# EAGLE board prefinish2 (EAGLE 4.16), part 1 of 2
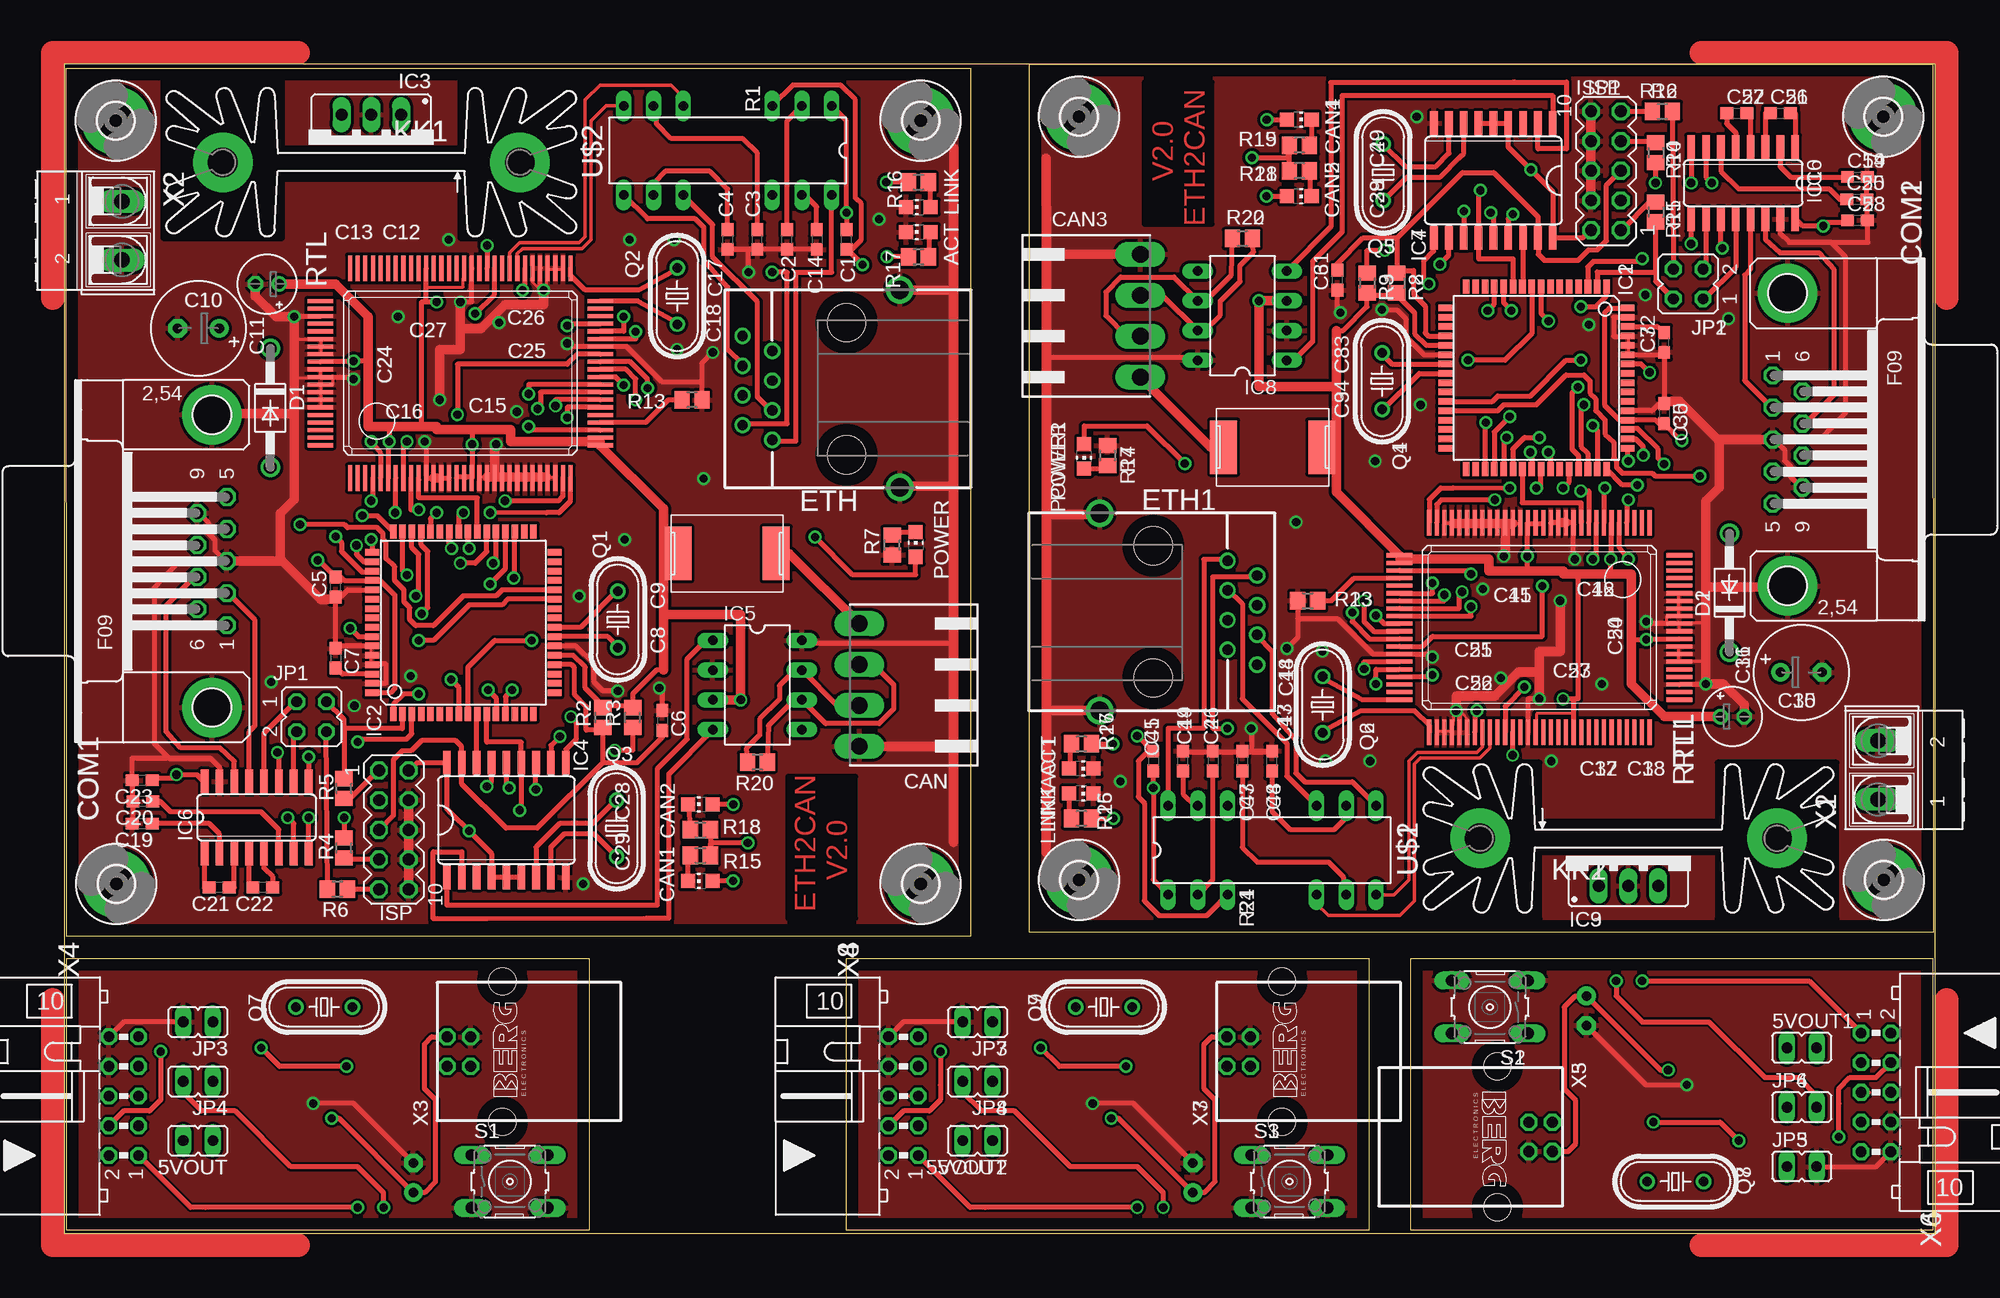
[diagram p0: board, top side]
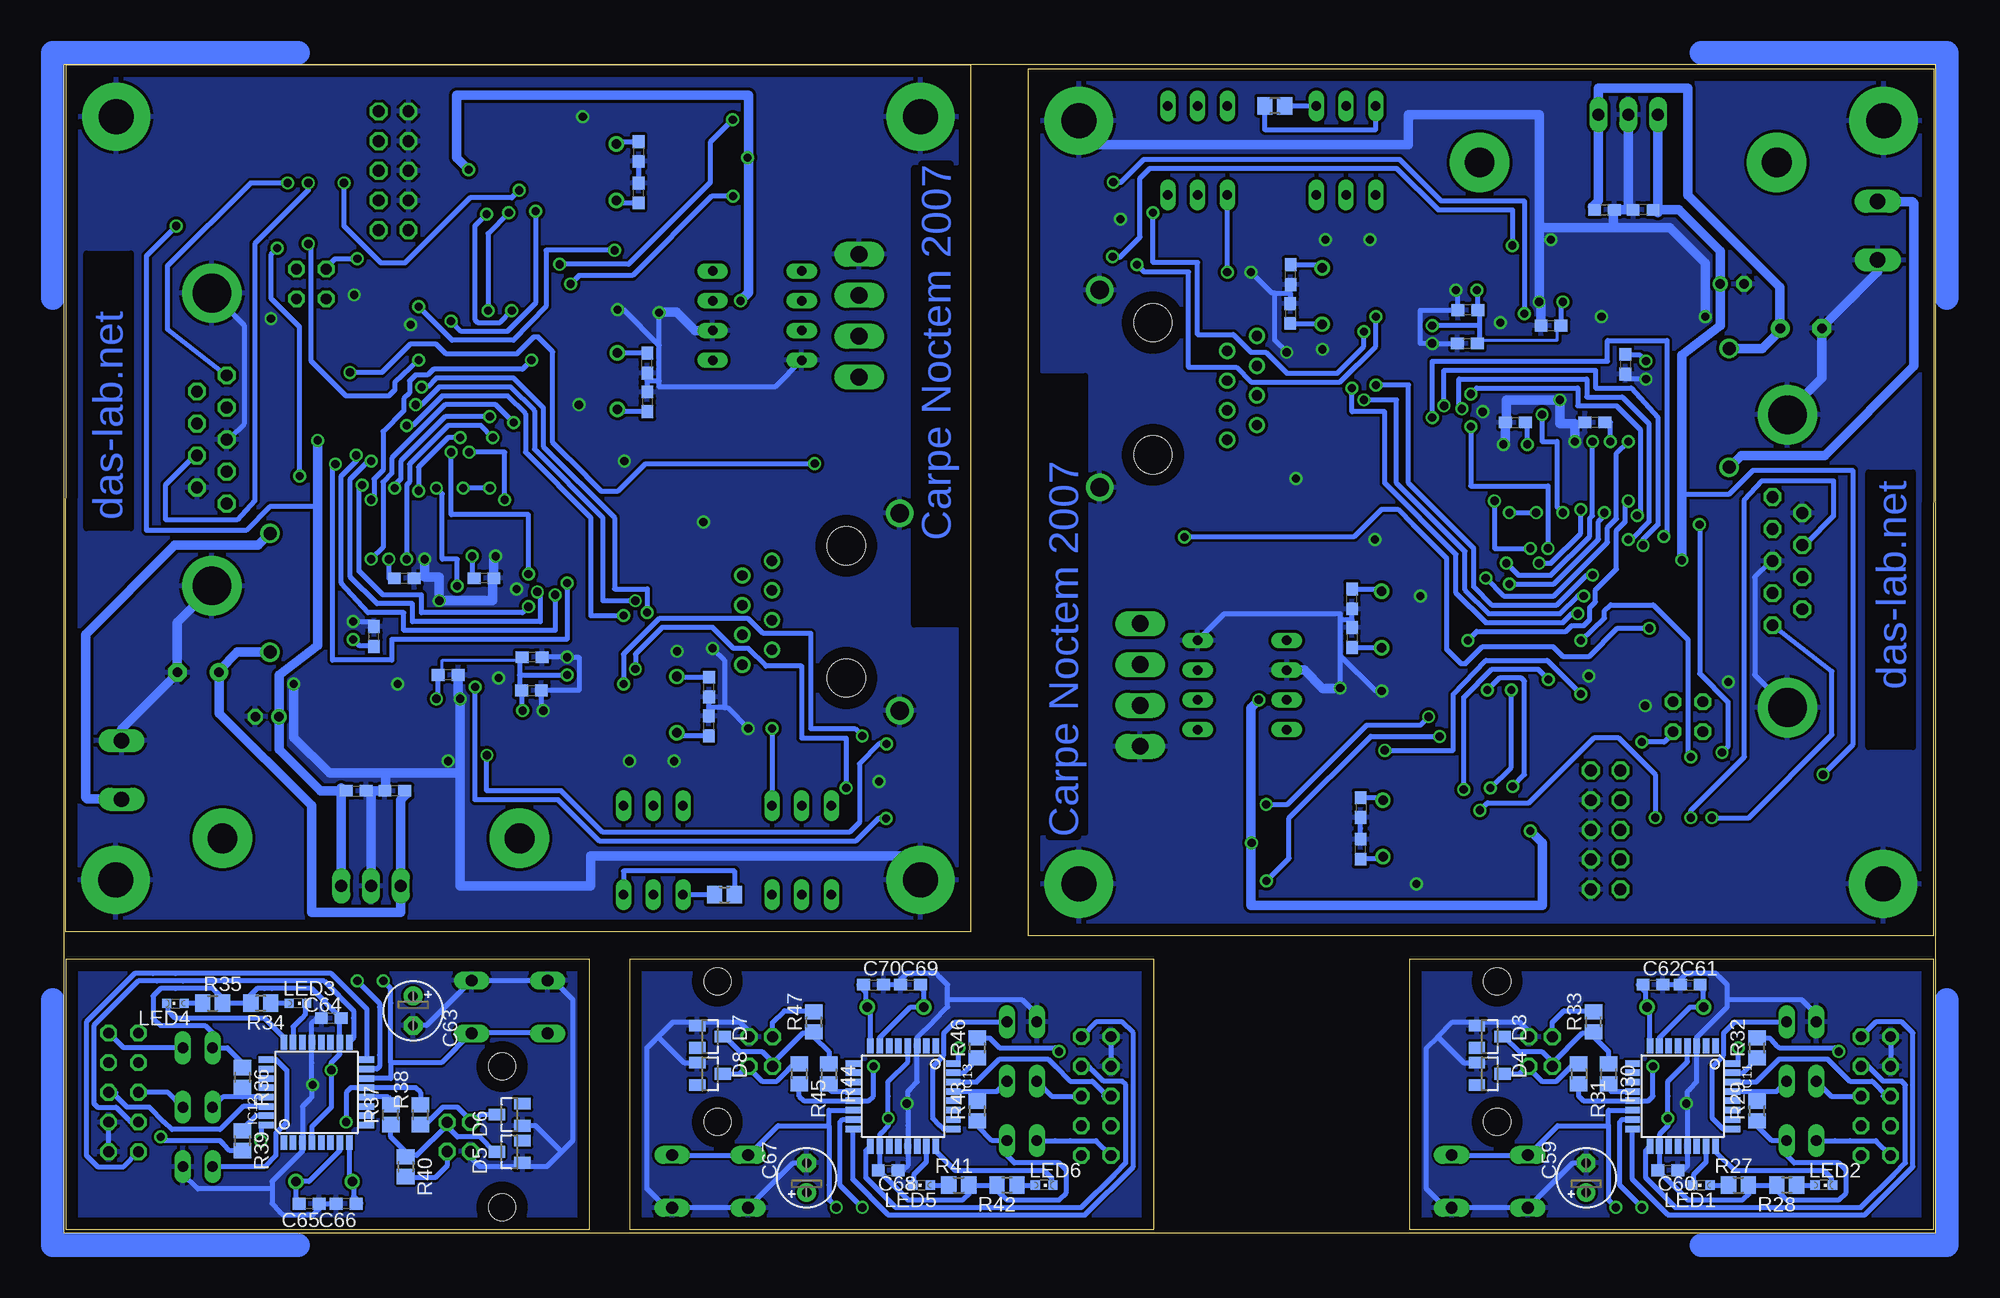
[diagram p1: board, bottom side, seen from below]

Size 160 x 100 mm. Coordinates in mm from the lower left corner, seen from the top.
Outline: 0,0 160,0 160,100 0,100 0,0
Outline: 77.52,25.46 77.52,99.6 0.13,99.6 0.18,25.46 77.52,25.46
Outline: 82.5,99.96 82.5,25.81 159.89,25.81 159.84,99.96 82.5,99.96
Outline: 44.92,0.32 44.92,23.48 0.17,23.48 0.17,0.32 44.92,0.32
Outline: 115.1,23.49 115.1,0.33 159.85,0.33 159.85,23.49 115.1,23.49
Outline: 111.59,0.32 111.59,23.48 66.84,23.48 66.84,0.32 111.59,0.32
Copper layers (1*16): Top 0.035mm / dielectric 1.5mm / Bottom 0.035mm
Design rules "default": minimum track width 10mil, minimum drill 24mil, track to track 8mil, track to pad 8mil, pad to pad 8mil, via to via 8mil, smd to smd 8mil, copper to edge 40mil, drill to drill 8mil, minimum pad ring 10mil, minimum via ring 8mil, stop-mask expansion 4mil, vias tented up to drill 0mil, thermal gap 10mil
tRestrict: area 61.9,27 to 67.6,39.1; area 92.4,86.4 to 98.1,98.4
bRestrict: area 72.7,34.3 to 76.5,73.3; area 1.9,41.6 to 5.7,65.1; area 83.5,52.1 to 87.3,91.1; area 154.3,60.3 to 158.1,83.8

## Footprints (pad centres in the part's own frame; a part is rotated, then mirrored left to right if it is on the bottom)
JP1 = drill 0.914 long: 1 0,-1.27; 2 0,1.27
CHIP-LED0805 = smd 1.2 x 1.2: A 0,-1.05; C 0,1.05
C0603 = smd 1.1 x 1: 1 -0.85,0; 2 0.85,0
E3,5-8 = drill 0.813 pad 1.6 round: + -1.778,0 | drill 0.813 pad 1.6 octagon: - 1.778,0
E2-5 = drill 0.813 pad 1.27 round: + -1.016,0 | drill 0.813 pad 1.27 octagon: - 1.016,0
E2,5-5 = drill 0.813 pad 1.6 round: + -1.27,0 | drill 0.813 pad 1.6 octagon: - 1.27,0
90-4 = drill 1.422 long: 1 -5.25,5.25; 2 -1.75,5.25; 3 1.75,5.25; 4 5.25,5.25
F09HP = drill 1.016 octagon: 1 -5.486,-1.27; 2 -2.743,-1.27; 3 0,-1.27; 4 2.743,-1.27; 5 5.486,-1.27; 6 -4.115,1.27; 7 -1.372,1.27; 8 1.372,1.27; 9 4.115,1.27 | drill 3.302 pad 5.08 round: G1 -12.522,0; G2 12.522,0
DO41-10 = drill 1.118 round: A 5.08,0; C -5.08,0
SOT23 = smd 1 x 1.4: 1 -0.95,-1.1; 2 0.95,-1.1; 3 0,1.1
557786-1 = drill 0.889 round: 1-1 -4.445,6.35; 1-2 -3.175,8.89; 1-3 -1.905,6.35; 1-4 -0.635,8.89; 1-5 0.635,6.35; 1-6 1.905,8.89; 1-7 3.175,6.35; 1-8 4.445,8.89 | drill 1.575 pad 2.184 round: G1 -8.509,-4.572; G2 8.382,-4.572 | hole 3.251: -5.715,0; 5.588,0
3425L = smd 2.29 x 4.57: P$1 -4.2,0; P$2 4.2,0
3,0-PAD = drill 3 pad 5.842 round: B3,0 0,0
TQFP64 = smd 1.194 x 0.559: 1 -7.8,6; 2 -7.8,5.2; 3 -7.8,4.4; 4 -7.8,3.6; 5 -7.8,2.8; 6 -7.8,2; 7 -7.8,1.2; 8 -7.8,0.4; 9 -7.8,-0.4; 10 -7.8,-1.2; 11 -7.8,-2; 12 -7.8,-2.8; 13 -7.8,-3.6; 14 -7.8,-4.4; 15 -7.8,-5.2; 16 -7.8,-6; 33 7.8,-6; 34 7.8,-5.2; 35 7.8,-4.4; 36 7.8,-3.6; 37 7.8,-2.8; 38 7.8,-2; 39 7.8,-1.2; 40 7.8,-0.4; 41 7.8,0.4; 42 7.8,1.2; 43 7.8,2; 44 7.8,2.8; 45 7.8,3.6; 46 7.8,4.4; 47 7.8,5.2; 48 7.8,6 | smd 0.559 x 1.194: 17 -6,-7.8; 18 -5.2,-7.8; 19 -4.4,-7.8; 20 -3.6,-7.8; 21 -2.8,-7.8; 22 -2,-7.8; 23 -1.2,-7.8; 24 -0.4,-7.8; 25 0.4,-7.8; 26 1.2,-7.8; 27 2,-7.8; 28 2.8,-7.8; 29 3.6,-7.8; 30 4.4,-7.8; 31 5.2,-7.8; 32 6,-7.8; 49 6,7.8; 50 5.2,7.8; 51 4.4,7.8; 52 3.6,7.8; 53 2.8,7.8; 54 2,7.8; 55 1.2,7.8; 56 0.4,7.8; 57 -0.4,7.8; 58 -1.2,7.8; 59 -2,7.8; 60 -2.8,7.8; 61 -3.6,7.8; 62 -4.4,7.8; 63 -5.2,7.8; 64 -6,7.8
78XXS = drill 1.016 long: GND 0,-2.54; IN -2.54,-2.54; OUT 2.54,-2.54
SO18L = smd 0.66 x 2.032: 1 -5.08,-4.902; 2 -3.81,-4.902; 3 -2.54,-4.902; 4 -1.27,-4.902; 5 0,-4.902; 6 1.27,-4.902; 7 2.54,-4.902; 8 3.81,-4.902; 9 5.08,-4.902; 10 5.08,4.902; 11 3.81,4.902; 12 2.54,4.902; 13 1.27,4.902; 14 0,4.902; 15 -1.27,4.902; 16 -2.54,4.902; 17 -3.81,4.902; 18 -5.08,4.902
DIL08 = drill 0.813 long: 1 -3.81,-3.81; 2 -1.27,-3.81; 3 1.27,-3.81; 4 3.81,-3.81; 5 3.81,3.81; 6 1.27,3.81; 7 -1.27,3.81; 8 -3.81,3.81
SO16 = smd 0.66 x 2.032: 1 -4.445,-3.073; 2 -3.175,-3.073; 3 -1.905,-3.073; 4 -0.635,-3.073; 5 0.635,-3.073; 6 1.905,-3.073; 7 3.175,-3.073; 8 4.445,-3.073; 9 4.445,3.073; 10 3.175,3.073; 11 1.905,3.073; 12 0.635,3.073; 13 -0.635,3.073; 14 -1.905,3.073; 15 -3.175,3.073; 16 -4.445,3.073
TQFP32-08 = smd 1.27 x 0.559: 1 -4.293,2.8; 2 -4.293,2; 3 -4.293,1.2; 4 -4.293,0.4; 5 -4.293,-0.4; 6 -4.293,-1.2; 7 -4.293,-2; 8 -4.293,-2.8; 17 4.293,-2.8; 18 4.293,-2; 19 4.293,-1.2; 20 4.293,-0.4; 21 4.293,0.4; 22 4.293,1.2; 23 4.293,2; 24 4.293,2.8 | smd 0.559 x 1.27: 9 -2.8,-4.293; 10 -2,-4.293; 11 -1.2,-4.293; 12 -0.4,-4.293; 13 0.4,-4.293; 14 1.2,-4.293; 15 2,-4.293; 16 2.8,-4.293; 25 2.8,4.293; 26 2,4.293; 27 1.2,4.293; 28 0.4,4.293; 29 -0.4,4.293; 30 -1.2,4.293; 31 -2,4.293; 32 -2.8,4.293
MA05-2 = drill 1.016 octagon: 1 -5.08,-1.27; 2 -5.08,1.27; 3 -2.54,-1.27; 4 -2.54,1.27; 5 0,-1.27; 6 0,1.27; 7 2.54,-1.27; 8 2.54,1.27; 9 5.08,-1.27; 10 5.08,1.27
JP2Q = drill 0.914 octagon: 1 -1.27,-1.27; 2 -1.27,1.27; 3 1.27,-1.27; 4 1.27,1.27
SK104 = drill 2.54 pad 5.08 round: A2,5 -12.7,-0.762; B2,5 12.7,-0.762
CHIPLED_0603 = smd 0.8 x 0.8: A 0,-0.75; C 0,0.75
HC49U-V = drill 0.813 round: 1 -2.413,0; 2 2.413,0
HC49/S = drill 0.813 round: 1 -2.413,0; 2 2.413,0
R0805 = smd 1.3 x 1.5: 1 -0.85,0; 2 0.85,0
RTL8019AS = smd 0.35 x 2.2: 1 -9.425,-8.965; 2 -8.775,-8.965; 3 -8.125,-8.965; 4 -7.475,-8.965; 5 -6.825,-8.965; 6 -6.175,-8.965; 7 -5.525,-8.965; 8 -4.875,-8.965; 9 -4.225,-8.965; 10 -3.575,-8.965; 11 -2.925,-8.965; 12 -2.275,-8.965; 13 -1.625,-8.965; 14 -0.975,-8.965; 15 -0.325,-8.965; 16 0.325,-8.965; 17 0.975,-8.965; 18 1.625,-8.965; 19 2.275,-8.965; 20 2.925,-8.965; 21 3.575,-8.965; 22 4.225,-8.965; 23 4.875,-8.965; 24 5.525,-8.965; 25 6.175,-8.965; 26 6.825,-8.965; 27 7.475,-8.965; 28 8.125,-8.965; 29 8.775,-8.965; 30 9.425,-8.965; 51 9.425,8.965; 52 8.775,8.965; 53 8.125,8.965; 54 7.475,8.965; 55 6.825,8.965; 56 6.175,8.965; 57 5.525,8.965; 58 4.875,8.965; 59 4.225,8.965; 60 3.575,8.965; 61 2.925,8.965; 62 2.275,8.965; 63 1.625,8.965; 64 0.975,8.965; 65 0.325,8.965; 66 -0.325,8.965; 67 -0.975,8.965; 68 -1.625,8.965; 69 -2.275,8.965; 70 -2.925,8.965; 71 -3.575,8.965; 72 -4.225,8.965; 73 -4.875,8.965; 74 -5.525,8.965; 75 -6.175,8.965; 76 -6.825,8.965; 77 -7.475,8.965; 78 -8.125,8.965; 79 -8.775,8.965; 80 -9.425,8.965 | smd 2.2 x 0.35: 31 11.965,-6.175; 32 11.965,-5.525; 33 11.965,-4.875; 34 11.965,-4.225; 35 11.965,-3.575; 36 11.965,-2.925; 37 11.965,-2.275; 38 11.965,-1.625; 39 11.965,-0.975; 40 11.965,-0.325; 41 11.965,0.325; 42 11.965,0.975; 43 11.965,1.625; 44 11.965,2.275; 45 11.965,2.925; 46 11.965,3.575; 47 11.965,4.225; 48 11.965,4.875; 49 11.965,5.525; 50 11.965,6.175; 81 -11.965,6.175; 82 -11.965,5.525; 83 -11.965,4.875; 84 -11.965,4.225; 85 -11.965,3.575; 86 -11.965,2.925; 87 -11.965,2.275; 88 -11.965,1.625; 89 -11.965,0.975; 90 -11.965,0.325; 91 -11.965,-0.325; 92 -11.965,-0.975; 93 -11.965,-1.625; 94 -11.965,-2.275; 95 -11.965,-2.925; 96 -11.965,-3.575; 97 -11.965,-4.225; 98 -11.965,-4.875; 99 -11.965,-5.525; 100 -11.965,-6.175
B3F-10XX = drill 1.016 long: 1 -3.251,2.261; 2 3.251,2.261; 3 -3.251,-2.261; 4 3.251,-2.261
DIL16/12 = drill 0.813 long: 1 -8.89,-3.81; 2 -6.35,-3.81; 3 -3.81,-3.81; 4 3.81,-3.81; 5 6.35,-3.81; 6 8.89,-3.81; 7 8.89,3.81; 8 6.35,3.81; 9 3.81,3.81; 10 -3.81,3.81; 11 -6.35,3.81; 12 -8.89,3.81
AK500/2-H = drill 1.321 long: 1 -2.515,0; 2 2.515,0
PN61729 = drill 0.95 octagon: 1 1.25,4.71; 2 -1.25,4.71; 3 -1.25,2.71; 4 1.25,2.71 | hole 2.3: -6.02,0; 6.02,0
ML10L = drill 0.914 octagon: 1 -5.08,-1.27; 2 -5.08,1.27; 3 -2.54,-1.27; 4 -2.54,1.27; 5 0,-1.27; 6 0,1.27; 7 2.54,-1.27; 8 2.54,1.27; 9 5.08,-1.27; 10 5.08,1.27

## Placement (x,y rotation side)
5VOUT  Supply target  [JP1]  11.43,7.94 90 top
5VOUT1  Supply target  [JP1]  148.59,15.88 270 top
5VOUT2  Supply target  [JP1]  78.11,7.94 90 top
ACT  [CHIP-LED0805]  73.04,85.65 90 top
ACT1  [CHIP-LED0805]  86.98,39.76 270 top
C1  66p  [C0603]  66.89,85.01 90 top
C2  10n  [C0603]  61.81,85.01 90 top
C3  10n  [C0603]  59.27,85.01 90 top
C4  10n  [C0603]  56.73,85.01 270 top
C5  100n  [C0603]  23.2,55.3 90 top
C6  100n  [C0603]  51.14,43.87 270 top
C7  100n  [C0603]  23.2,49.2 270 top
C8  22p  [C0603]  49.87,50.98 270 bottom
C9  22p  [C0603]  49.87,54.28 90 bottom
C10  220µF/25V  [E3,5-8]  11.47,77.42 180 top
C11  10µF/35V  [E2-5]  17.36,81.2 180 top
C12  100n  [C0603]  28.28,87.55 0 bottom
C13  100n  [C0603]  24.98,87.55 180 bottom
C14  10n  [C0603]  64.35,85.01 270 top
C15  100n  [C0603]  35.9,69.37 0 bottom
C16  100n  [C0603]  29.1,69.37 180 bottom
C17  27p  [C0603]  55.13,82.02 90 bottom
C18  27p  [C0603]  55.16,78.69 270 bottom
C19  100n  [C0603]  6.67,35.05 180 top
C20  100n  [C0603]  6.72,36.96 180 top
C21  100n  [C0603]  13.25,29.59 180 top
C22  100n  [C0603]  16.98,29.59 180 top
C23  100n  [C0603]  6.67,38.76 180 top
C24  100n  [C0603]  26.5,74.35 270 bottom
C25  100n  [C0603]  40.02,76.12 0 bottom
C26  100n  [C0603]  39.97,78.97 180 bottom
C27  100n  [C0603]  32.85,77.65 0 bottom
C28  22p  [C0603]  49.14,36.42 270 bottom
C29  22p  [C0603]  49.14,32.87 90 bottom
C30  100n  [C0603]  136.82,70.12 270 top
C31  100n  [C0603]  108.88,81.55 90 top
C32  100n  [C0603]  136.82,76.21 90 top
C33  22p  [C0603]  110.15,74.43 90 bottom
C34  22p  [C0603]  110.15,71.13 270 bottom
C35  220µF/25V  [E3,5-8]  148.55,47.99 0 top
C36  10µF/35V  [E2-5]  142.66,44.21 0 top
C37  100n  [C0603]  131.74,37.86 180 bottom
C38  100n  [C0603]  135.04,37.86 0 bottom
C39  22p  [C0603]  110.88,88.99 90 bottom
C40  22p  [C0603]  110.88,92.54 270 bottom
C41  100n  [C0603]  124.12,56.05 180 bottom
C42  100n  [C0603]  130.92,56.05 0 bottom
C43  27p  [C0603]  104.89,43.4 270 bottom
C44  27p  [C0603]  104.86,46.72 90 bottom
C45  66p  [C0603]  93.13,40.4 270 top
C46  10n  [C0603]  98.21,40.4 270 top
C47  10n  [C0603]  100.75,40.4 270 top
C48  10n  [C0603]  103.29,40.4 90 top
C49  10n  [C0603]  95.67,40.4 90 top
C50  100n  [C0603]  133.52,51.07 90 bottom
C51  100n  [C0603]  120,49.29 180 bottom
C52  100n  [C0603]  120.05,46.44 0 bottom
C53  100n  [C0603]  127.17,47.76 180 bottom
C54  100n  [C0603]  153.35,90.36 0 top
C55  100n  [C0603]  153.3,88.46 0 top
C56  100n  [C0603]  146.77,95.82 0 top
C57  100n  [C0603]  143.04,95.82 0 top
C58  100n  [C0603]  153.35,86.65 0 top
C59  4u7  [E2,5-5]  29.84,4.76 90 bottom
C60  100n  [C0603]  22.86,5.4 0 bottom
C61  22p  [C0603]  20.95,21.27 0 bottom
C62  22p  [C0603]  24.13,21.27 0 bottom
C63  4u7  [E2,5-5]  130.18,19.05 270 bottom
C64  100n  [C0603]  137.16,18.41 180 bottom
C65  22p  [C0603]  139.06,2.54 180 bottom
C66  22p  [C0603]  135.89,2.54 180 bottom
C67  4u7  [E2,5-5]  96.52,4.76 90 bottom
C68  100n  [C0603]  89.53,5.4 0 bottom
C69  22p  [C0603]  87.63,21.27 0 bottom
C70  22p  [C0603]  90.81,21.27 0 bottom
CAN  [90-4]  73.24,46.91 90 top
CAN1  [CHIP-LED0805]  54.39,30.15 90 top
CAN2  [CHIP-LED0805]  54.39,36.7 90 top
CAN3  [90-4]  86.78,78.5 270 top
CAN4  [CHIP-LED0805]  105.63,95.26 270 top
CAN5  [CHIP-LED0805]  105.63,88.71 270 top
COM1  [F09HP]  12.64,57.51 90 top
COM2  [F09HP]  147.38,67.91 270 top
D1  1N4001  [DO41-10]  17.61,70.61 270 top
D2  1N4001  [DO41-10]  142.41,54.8 90 top
D3  3V6  [SOT23]  38.1,16.83 270 bottom
D4  3V6  [SOT23]  38.1,13.65 270 bottom
D5  3V6  [SOT23]  121.92,6.99 90 bottom
D6  3V6  [SOT23]  121.92,10.16 90 bottom
D7  3V6  [SOT23]  104.78,16.83 270 bottom
D8  3V6  [SOT23]  104.78,13.65 270 bottom
ETH  [557786-1]  66.89,72.31 90 top
ETH1  [557786-1]  93.13,53.1 270 top
F1  3425L  [3425L]  103.34,67.25 0 top
F2  3425L  [3425L]  56.68,58.17 180 top
H1  MOUNT-PAD-ROUND3.0  [3,0-PAD]  73.24,95.17 90 top
H2  MOUNT-PAD-ROUND3.0  [3,0-PAD]  4.46,29.9 90 top
H3  MOUNT-PAD-ROUND3.0  [3,0-PAD]  73.24,29.9 90 top
H4  MOUNT-PAD-ROUND3.0  [3,0-PAD]  4.41,95.17 90 top
H5  MOUNT-PAD-ROUND3.0  [3,0-PAD]  86.78,30.24 270 top
H6  MOUNT-PAD-ROUND3.0  [3,0-PAD]  155.56,95.52 270 top
H7  MOUNT-PAD-ROUND3.0  [3,0-PAD]  86.78,95.52 270 top
H8  MOUNT-PAD-ROUND3.0  [3,0-PAD]  155.61,30.24 270 top
IC1  MEGA128-A  [TQFP64]  125.9,73.16 270 top
IC2  MEGA128-A  [TQFP64]  34.12,52.25 90 top
IC3  [78XXS]  26.25,93.14 180 top
IC4  MCP2515-E/SO  [SO18L]  37.81,35.36 0 top
IC5  PCA82C250  [DIL08]  59.27,46.91 270 top
IC6  MAX3232CSE  [SO16]  16.45,35.59 0 top
IC7  MCP2515-E/SO  [SO18L]  122.21,90.06 180 top
IC8  PCA82C250  [DIL08]  100.75,78.5 90 top
IC9  [78XXS]  133.77,32.27 0 top
IC10  MAX3232CSE  [SO16]  143.57,89.83 180 top
IC11  ATMega48 *  [TQFP32-08]  21.59,11.75 270 bottom
IC12  ATMega48 *  [TQFP32-08]  138.43,12.06 90 bottom
IC13  ATMega48 *  [TQFP32-08]  88.27,11.75 270 bottom
ISP  [MA05-2]  28.18,34.52 270 top
ISP1  [MA05-2]  131.84,90.89 90 top
JP1  [JP2Q]  21.15,44.2 270 top
JP2  [JP2Q]  138.87,81.22 90 top
JP3  Slow SCK  [JP1]  11.43,18.1 90 top
JP4  Self programming  [JP1]  11.43,13.02 90 top
JP5  Slow SCK  [JP1]  148.59,5.71 270 top
JP6  Self programming  [JP1]  148.59,10.79 270 top
JP7  Slow SCK  [JP1]  78.11,18.1 90 top
JP8  Self programming  [JP1]  78.11,13.02 90 top
KK1  SK104  [SK104]  26.25,90.86 180 top
KK2  SK104  [SK104]  133.77,34.56 0 top
LED1  green  [CHIPLED_0603]  20,4.13 90 bottom
LED2  yellow  [CHIPLED_0603]  9.53,4.13 270 bottom
LED3  green  [CHIPLED_0603]  140.02,19.68 270 bottom
LED4  yellow  [CHIPLED_0603]  150.5,19.68 90 bottom
LED5  green  [CHIPLED_0603]  86.68,4.13 90 bottom
LED6  yellow  [CHIPLED_0603]  76.2,4.13 270 bottom
LINK  [CHIP-LED0805]  73.04,87.78 90 top
LINK1  [CHIP-LED0805]  86.98,37.63 270 top
POWER  [CHIP-LED0805]  72.81,58.93 0 top
POWER1  [CHIP-LED0805]  87.21,66.48 180 top
Q1  16MHz  [HC49U-V]  47.33,52.5 270 top
Q2  20MHz  [HC49U-V]  52.41,80.19 90 top
Q3  16MHz  [HC49U-V]  47.23,34.65 270 top
Q4  16MHz  [HC49U-V]  112.69,72.91 90 top
Q5  16MHz  [HC49U-V]  112.79,90.77 90 top
Q6  20MHz  [HC49U-V]  107.61,45.22 270 top
Q7  12MHz  [HC49/S]  22.23,19.37 180 top
Q8  12MHz  [HC49/S]  137.79,4.45 0 top
Q9  12MHz  [HC49/S]  88.9,19.37 180 top
R1  200  [R0805]  56.48,96.44 180 bottom
R2  10k  [R0805]  46.06,44.12 90 top
R3  1k  [R0805]  48.6,44.12 90 top
R4  4k7  [R0805]  23.91,32.97 90 top
R5  4k7  [R0805]  23.91,38.05 90 top
R6  4k7  [R0805]  23.36,29.44 180 top
R7  2k7  [R0805]  70.8,58.88 90 top
R8  10k  [R0805]  113.96,81.29 270 top
R9  1k  [R0805]  111.42,81.29 270 top
R10  4k7  [R0805]  136.11,92.44 270 top
R11  4k7  [R0805]  136.11,87.36 270 top
R12  4k7  [R0805]  136.66,95.97 0 top
R13  4k7  [R0805]  53.68,71.3 180 top
R14  2k7  [R0805]  89.22,66.54 270 top
R15  2k7  [R0805]  54.39,32.33 0 top
R16  2k7  [R0805]  73.04,89.92 0 top
R17  2k7  [R0805]  73.04,83.54 0 top
R18  2k7  [R0805]  54.39,34.52 0 top
R19  2k7  [R0805]  105.63,93.08 180 top
R20  4k7  [R0805]  59.27,40.31 180 top
R21  2k7  [R0805]  105.63,90.89 180 top
R22  4k7  [R0805]  100.75,85.1 0 top
R23  4k7  [R0805]  106.34,54.11 0 top
R24  200  [R0805]  103.54,28.97 0 bottom
R25  2k7  [R0805]  86.98,35.5 180 top
R26  2k7  [R0805]  86.98,41.87 180 top
R27  2k7  [R0805]  16.83,4.13 0 bottom
R28  2k7  [R0805]  12.7,4.13 180 bottom
R29  10k  [R0805]  15.24,10.48 90 bottom
R30  68  [R0805]  27.94,13.65 270 bottom
R31  68  [R0805]  30.48,13.65 270 bottom
R32  1k  [R0805]  15.24,15.88 90 bottom
R33  2k2  [R0805]  29.21,18.1 90 bottom
R34  2k7  [R0805]  143.19,19.68 180 bottom
R35  2k7  [R0805]  147.32,19.68 0 bottom
R36  10k  [R0805]  144.78,13.34 270 bottom
R37  68  [R0805]  132.08,10.16 90 bottom
R38  68  [R0805]  129.54,10.16 90 bottom
R39  1k  [R0805]  144.78,7.94 270 bottom
R40  2k2  [R0805]  130.81,5.71 270 bottom
R41  2k7  [R0805]  83.5,4.13 0 bottom
R42  2k7  [R0805]  79.38,4.13 180 bottom
R43  10k  [R0805]  81.92,10.48 90 bottom
R44  68  [R0805]  94.61,13.65 270 bottom
R45  68  [R0805]  97.16,13.65 270 bottom
R46  1k  [R0805]  81.92,15.88 90 bottom
R47  2k2  [R0805]  95.89,18.1 90 bottom
RTL  RTL8019AS  [RTL8019AS]  33.87,73.58 0 top
RTL1  RTL8019AS  [RTL8019AS]  126.15,51.83 180 top
S1  RESET  [B3F-10XX]  38.1,4.45 0 top
S2  RESET  [B3F-10XX]  121.92,19.37 180 top
S3  RESET  [B3F-10XX]  104.78,4.45 0 top
U$1  [DIL16/12]  103.29,32.78 0 top
U$2  [DIL16/12]  56.73,92.63 180 top
X1  [AK500/2-H]  155.11,39.64 90 top
X2  [AK500/2-H]  4.91,85.78 270 top
X3  USB  [PN61729]  37.47,15.56 90 top
X4  ISP  [ML10L]  5.08,11.75 90 top
X5  USB  [PN61729]  122.56,8.26 270 top
X6  ISP  [ML10L]  154.94,12.06 270 top
X7  USB  [PN61729]  104.14,15.56 90 top
X8  ISP  [ML10L]  71.75,11.75 90 top

## Library data of the parts
5VOUT 5VOUT1 5VOUT2 JP1-JP8 = jumper
ACT ACT1 CAN1 CAN2 CAN4 CAN5 LED1-LED6 LINK LINK1 POWER POWER1 = led
C1-C70 R1-R47 = rcl
CAN CAN3 = con-weidmueller-sl35
COM1 COM2 = con-subd
D1-D8 = diode
ETH ETH1 = con-amp
F1 F2 = ptc-littlefuse
H1-H8 = holes
IC1 IC2 IC11-IC13 = atmel
IC3 IC9 = v-reg
IC4 IC7 = mcp2515
IC5 IC8 = micro-philips
IC6 IC10 = maxim
ISP ISP1 = con-lstb
KK1 KK2 = heatsink
Q1-Q9 = crystal
RTL RTL1 = rtl8019as
S1-S3 = switch-omron
U$1 U$2 = Realtek
X1 X2 = con-ptr500
X3 X5 X7 = con-berg
X4 X6 X8 = con-harting-ml

## Nets
+5V: 5VOUT.1 C59.+ C60.1 IC11.4 IC11.18 R27.2 R28.2 R29.1 R33.2 X3.1
+5V1: 5VOUT1.1 C63.+ C64.1 IC12.4 IC12.18 R34.2 R35.2 R36.1 R40.2 X5.1
+5V2: 5VOUT2.1 C67.+ C68.1 IC13.4 IC13.18 R41.2 R42.2 R43.1 R47.2 X7.1
A0: IC2.35 RTL.5
A1: IC2.36 RTL.7
A2: IC2.37 RTL.8
A3: IC2.38 RTL.9
A4: IC2.39 RTL.10
A5: IC2.40 RTL.29
A6: IC2.41 RTL.30
A7: IC2.42 RTL.33
A8: IC1.42 RTL1.33
A9: IC1.41 RTL1.30
A10: IC2.9 RTL.4
A11: IC1.40 RTL1.29
A12: IC1.39 RTL1.10
A13: IC1.38 RTL1.9
A14: IC1.37 RTL1.8
A15: IC1.36 RTL1.7
A16: IC1.35 RTL1.5
A17: IC1.9 RTL1.4
CAN_INT: IC2.8 IC4.12
CAN_INT1: IC1.8 IC7.12
CS: IC2.10 IC4.16
CS1: IC1.10 IC7.16
D0: IC2.51 RTL.36
D1: IC2.50 RTL.37
D2: IC2.49 RTL.38
D3: IC2.48 RTL.39
D4: IC2.47 RTL.40
D5: IC2.46 RTL.41
D6: IC2.45 RTL.42
D7: IC2.44 RTL.43
D8: IC1.51 RTL1.36
D9: IC1.50 RTL1.37
D10: IC1.49 RTL1.38
D11: IC1.48 RTL1.39
D12: IC1.47 RTL1.40
D13: IC1.46 RTL1.41
D14: IC1.45 RTL1.42
D15: IC1.44 RTL1.43
GND: ACT.C C2.1 C3.1 C4.2 C5.1 C6.1 C7.1 C8.1 C9.1 C10.- C11.- C12.2 C13.2 C14.2 C15.1 C16.2 C17.1 C18.1 C19.2 C20.2 C23.2 C24.2 C25.1 C26.2 C27.1 C28.2 C29.2 CAN.1 COM1.3 COM1.9 COM1.G1 COM1.G2 ETH.G1 ETH.G2 H1.B3,0 H2.B3,0 H3.B3,0 H4.B3,0 IC2.22 IC2.53 IC2.59 IC2.60 IC2.61 IC2.63 IC3.GND IC4.9 IC5.2 IC5.8 IC6.15 ISP.4 ISP.6 ISP.8 ISP.10 LINK.C R7.1 R13.1 RTL.11 RTL.12 RTL.13 RTL.14 RTL.18 RTL.19 RTL.20 RTL.21 RTL.22 RTL.23 RTL.24 RTL.25 RTL.26 RTL.27 RTL.28 RTL.44 RTL.52 RTL.53 RTL.54 RTL.55 RTL.56 RTL.64 RTL.83 RTL.86 RTL.87 RTL.88 RTL.90 RTL.91 RTL.92 RTL.93 RTL.94 RTL.95 X2.2
GND1: ACT1.C C30.1 C31.1 C32.1 C33.1 C34.1 C35.- C36.- C37.2 C38.2 C39.2 C40.2 C41.1 C42.2 C43.1 C44.1 C46.1 C47.1 C48.2 C49.2 C50.2 C51.1 C52.2 C53.1 C54.2 C55.2 C58.2 CAN3.1 COM2.3 COM2.9 COM2.G1 COM2.G2 ETH1.G1 ETH1.G2 H5.B3,0 H6.B3,0 H7.B3,0 H8.B3,0 IC1.22 IC1.53 IC1.59 IC1.60 IC1.61 IC1.63 IC7.9 IC8.2 IC8.8 IC9.GND IC10.15 ISP1.4 ISP1.6 ISP1.8 ISP1.10 LINK1.C R14.1 R23.1 RTL1.11 RTL1.12 RTL1.13 RTL1.14 RTL1.18 RTL1.19 RTL1.20 RTL1.21 RTL1.22 RTL1.23 RTL1.24 RTL1.25 RTL1.26 RTL1.27 RTL1.28 RTL1.44 RTL1.52 RTL1.53 RTL1.54 RTL1.55 RTL1.56 RTL1.64 RTL1.83 RTL1.86 RTL1.87 RTL1.88 RTL1.90 RTL1.91 RTL1.92 RTL1.93 RTL1.94 RTL1.95 X1.2
GND2: C59.- C60.2 C61.1 C62.2 D3.1 D4.1 IC11.3 IC11.21 JP3.2 S1.3 S1.4 X3.4 X4.8 X4.10
GND3: C63.- C64.2 C65.1 C66.2 D5.1 D6.1 IC12.3 IC12.21 JP5.2 S2.3 S2.4 X5.4 X6.8 X6.10
GND4: C67.- C68.2 C69.1 C70.2 D7.1 D8.1 IC13.3 IC13.21 JP7.2 S3.3 S3.4 X7.4 X8.8 X8.10
MISO: IC2.13 IC4.15
MISO1: IC1.13 IC7.15
MOSI: IC2.12 IC4.14
MOSI1: IC1.12 IC7.14
N$1: R1.2 RTL.58 U$2.6
N$2: IC4.1 IC5.1
N$3: R1.1 RTL.59 U$2.4
N$4: C1.1 RTL.46 U$2.3
N$5: C7.2 IC2.62
N$6: C9.2 IC2.24 Q1.1
N$7: C8.2 IC2.23 Q1.2
N$8: C10.+ C12.1 D1.C IC3.IN
N$9: POWER.C R7.2
N$10: D1.A X2.1
N$11: C1.2 RTL.45 U$2.1
N$12: C3.2 U$2.5
N$13: C2.2 U$2.2
N$14: C14.1 U$2.11
N$15: C4.1 U$2.8
N$16: CAN.4 F2.P$1
N$17: C21.2 IC6.1
N$18: ETH.1-1 U$2.12
N$19: ETH.1-2 U$2.10
N$20: ETH.1-3 U$2.9
N$21: IC4.2 IC5.4
N$22: ISP.9 R6.1
N$23: CAN.3 IC5.6 R20.1
N$24: ETH.1-6 U$2.7
N$25: ISP.1 R5.1
N$26: IC2.1 R3.1
N$27: CAN1.A IC4.11
N$28: ACT.A R17.2
N$29: ISP.7 R4.1
N$30: C22.2 IC6.4
N$31: LINK.A R16.2
N$32: IC2.58 POWER.A
N$33: IC2.2 JP1.2 R5.2
N$34: C17.2 Q2.2 RTL.51
N$35: C18.2 Q2.1 RTL.50
N$36: C22.1 IC6.5
N$37: C21.1 IC6.3
N$38: CAN2.A IC4.10
N$39: R13.2 RTL.34
N$40: COM1.7 IC6.14
N$41: COM1.8 IC6.8
N$42: C32.2 IC1.62
N$43: C19.1 IC6.2
N$44: IC2.3 JP1.4 R6.2
N$45: R16.1 RTL.61
N$46: C20.1 IC6.6
N$47: R17.1 RTL.62
N$48: CAN1.C R15.1
N$49: COM1.1 IC6.7
N$50: COM1.2 IC6.13
N$51: C34.2 IC1.24 Q4.1
N$52: CAN2.C R18.1
N$53: C28.1 IC4.7 Q3.1
N$54: C29.1 IC4.8 Q3.2
N$55: C33.2 IC1.23 Q4.2
N$56: IC1.1 R9.1
N$57: ISP1.9 R12.1
N$58: ISP1.1 R11.1
N$59: CAN.2 IC5.7 R20.2
N$60: ISP1.7 R10.1
N$61: IC1.58 POWER1.A
N$62: IC7.1 IC8.1
N$63: IC7.2 IC8.4
N$64: C35.+ C37.1 D2.C IC9.IN
N$65: D2.A X1.1
N$66: CAN4.A IC7.11
N$67: CAN5.A IC7.10
N$68: CAN4.C R19.1
N$69: CAN5.C R21.1
N$70: C39.1 IC7.7 Q5.1
N$71: C40.1 IC7.8 Q5.2
N$72: CAN3.3 IC8.6 R22.1
N$73: CAN3.2 IC8.7 R22.2
N$74: C43.2 Q6.2 RTL1.51
N$75: C44.2 Q6.1 RTL1.50
N$76: R23.2 RTL1.34
N$77: R24.2 RTL1.58 U$1.6
N$78: R24.1 RTL1.59 U$1.4
N$79: C45.1 RTL1.46 U$1.3
N$80: C45.2 RTL1.45 U$1.1
N$81: C47.2 U$1.5
N$82: C46.2 U$1.2
N$83: C49.1 U$1.11
N$84: C48.1 U$1.8
N$85: ETH1.1-1 U$1.12
N$86: ETH1.1-2 U$1.10
N$87: ETH1.1-3 U$1.9
N$88: ETH1.1-6 U$1.7
N$89: R25.1 RTL1.61
N$90: R26.1 RTL1.62
N$91: CAN3.4 F1.P$1
N$92: C56.2 IC10.1
N$93: C57.2 IC10.4
N$94: C57.1 IC10.5
N$95: C56.1 IC10.3
N$96: COM2.7 IC10.14
N$97: COM2.8 IC10.8
N$98: C54.1 IC10.2
N$99: C55.1 IC10.6
N$100: COM2.1 IC10.7
N$101: COM2.2 IC10.13
N$102: POWER1.C R14.2
N$103: ACT1.A R26.2
N$104: LINK1.A R25.2
N$105: IC1.3 JP2.4 R12.2
N$106: IC1.2 JP2.2 R11.2
N$107: D4.3 R31.1 X3.3
N$108: C61.2 IC11.7 Q7.2
N$109: C62.1 IC11.8 Q7.1
N$110: IC11.13 IC11.32 R31.2
N$111: IC11.29 JP4.1 R29.2
N$112: IC11.14 JP4.2 S1.1 S1.2 X4.5
N$113: IC11.15 X4.1
N$114: IC11.17 X4.7
N$115: IC11.16 X4.9
N$116: IC11.31 R32.1
N$117: R32.2 X4.4
N$118: IC11.30 X4.6
N$119: IC11.25 JP3.1
N$120: IC11.23 LED1.C
N$121: IC11.24 LED2.C
N$122: D3.3 R30.1 R33.1 X3.2
N$123: IC11.12 R30.2
N$124: LED1.A R27.1
N$125: LED2.A R28.1
N$126: 5VOUT.2 X4.2
N$127: D6.3 R38.1 X5.3
N$128: C65.2 IC12.7 Q8.2
N$129: C66.1 IC12.8 Q8.1
N$130: IC12.13 IC12.32 R38.2
N$131: IC12.29 JP6.1 R36.2
N$132: IC12.14 JP6.2 S2.1 S2.2 X6.5
N$133: IC12.15 X6.1
N$134: IC12.17 X6.7
N$135: IC12.16 X6.9
N$136: IC12.31 R39.1
N$137: R39.2 X6.4
N$138: IC12.30 X6.6
N$139: IC12.25 JP5.1
N$140: IC12.23 LED3.C
N$141: IC12.24 LED4.C
N$142: D5.3 R37.1 R40.1 X5.2
N$143: IC12.12 R37.2
N$144: LED3.A R34.1
N$145: LED4.A R35.1
N$146: 5VOUT1.2 X6.2
N$147: D8.3 R45.1 X7.3
N$148: C69.2 IC13.7 Q9.2
N$149: C70.1 IC13.8 Q9.1
N$150: IC13.13 IC13.32 R45.2
N$151: IC13.29 JP8.1 R43.2
N$152: IC13.14 JP8.2 S3.1 S3.2 X8.5
N$153: IC13.15 X8.1
N$154: IC13.17 X8.7
N$155: IC13.16 X8.9
N$156: IC13.31 R46.1
N$157: R46.2 X8.4
N$158: IC13.30 X8.6
N$159: IC13.25 JP7.1
N$160: IC13.23 LED5.C
N$161: IC13.24 LED6.C
N$162: D7.3 R44.1 R47.1 X7.2
N$163: IC13.12 R44.2
N$164: LED5.A R41.1
N$165: LED6.A R42.1
N$166: 5VOUT2.2 X8.2
RST: C6.2 IC2.20 IC4.17 ISP.5 R2.1
RST1: C31.2 IC1.20 IC7.17 ISP1.5 R8.1
RXD: IC6.12 JP1.1
RXD1: IC2.27 IC6.9
RXD2: IC1.27 IC10.9
RXD3: IC10.12 JP2.1
SCK: IC2.11 IC4.13 R4.2
SCK1: IC1.11 IC7.13 R10.2
TXD: IC6.10 JP1.3
TXD1: IC2.28 IC6.11
TXD2: IC1.28 IC10.11
TXD3: IC10.10 JP2.3
VCC: C5.2 C11.+ C13.1 C15.2 C16.1 C23.1 C24.1 C25.2 C26.1 C27.2 F2.P$2 IC2.21 IC2.52 IC2.64 IC3.OUT IC4.4 IC4.5 IC4.6 IC4.18 IC5.3 IC6.16 ISP.2 R2.2 R3.2 R15.2 R18.2 RTL.6 RTL.15 RTL.16 RTL.17 RTL.31 RTL.32 RTL.47 RTL.57 RTL.65 RTL.70 RTL.89
VCC1: C30.2 C36.+ C38.1 C41.2 C42.1 C50.1 C51.2 C52.1 C53.2 C58.1 F1.P$2 IC1.21 IC1.52 IC1.64 IC7.4 IC7.5 IC7.6 IC7.18 IC8.3 IC9.OUT IC10.16 ISP1.2 R8.2 R9.2 R19.2 R21.2 RTL1.6 RTL1.15 RTL1.16 RTL1.17 RTL1.31 RTL1.32 RTL1.47 RTL1.57 RTL1.65 RTL1.70 RTL1.89

## Tracks (layer width: path | path; a pad name or v marks a point on that pad's centre or on a via)
+5V  (via drill 0.7)
  Top 0.406: v22.86,9.84 23.5,9.84 C59.+ 30.8,3.49 31.75,4.45 31.75,11.43 30.8,12.38 30.8,16.19 31.43,16.83 32.38,16.83 32.7,16.51 32.76,16.56 X3.1
  Bottom 0.406: IC11.4 21.19,14.69 22.86,13.02 22.86,11.75 v22.86,9.84 22.86,9.21 23.5,8.57 23.59,8.48 IC11.18 23.59,5.49 23.5,5.4 C60.1 21.17,2.86 17.78,2.86 17.14,2.86 16.51,2.86 15.88,3.49 15.88,4.13 | 29.21,18.73 R33.2 29.21,19.05 31.75,19.05 32.76,18.05 X3.1 33,16.81 33.02,16.83 | R29.1 15.24,9.21 13.97,7.94 5VOUT.1 12.7,6.67 12.06,6.03 8.26,6.03 7.62,5.4 7.62,3.49 8.26,2.86 9.53,2.86 12.7,2.86 13.55,3.71 R28.2 13.65,4.13 15.88,4.13 | C59.+ 29.84,3.17 | 15.88,4.13 R27.2
+5V1  (via drill 0.7)
  Top 0.406: v137.16,13.97 136.53,13.97 C63.+ 129.22,20.32 128.27,19.37 128.27,12.38 129.22,11.43 129.22,7.62 128.59,6.99 127.64,6.99 127.32,7.3 127.27,7.25 X5.1
  Bottom 0.406: IC12.4 138.83,9.12 137.16,10.79 137.16,12.06 v137.16,13.97 137.16,14.61 136.53,15.24 136.43,15.34 IC12.18 136.43,18.32 136.53,18.41 C64.1 138.85,20.95 142.24,20.95 142.88,20.95 143.51,20.95 144.15,20.32 144.15,19.68 | 130.81,5.08 R40.2 130.81,4.76 128.27,4.76 127.27,5.77 X5.1 127.02,7 127,6.99 | R36.1 144.78,14.61 146.05,15.88 5VOUT1.1 147.32,17.14 147.96,17.78 151.76,17.78 152.4,18.41 152.4,20.32 151.76,20.95 150.5,20.95 147.32,20.95 146.47,20.11 R35.2 146.37,19.68 144.15,19.68 | C63.+ 130.18,20.64 | 144.15,19.68 R34.2
+5V2  (via drill 0.7)
  Top 0.406: v89.53,9.84 90.17,9.84 C67.+ 97.47,3.49 98.42,4.45 98.42,11.43 97.47,12.38 97.47,16.19 98.11,16.83 99.06,16.83 99.38,16.51 99.43,16.56 X7.1
  Bottom 0.406: IC13.4 87.86,14.69 89.53,13.02 89.53,11.75 v89.53,9.84 89.53,9.21 90.17,8.57 90.27,8.48 IC13.18 90.27,5.49 90.17,5.4 C68.1 87.84,2.86 84.45,2.86 83.82,2.86 83.19,2.86 82.55,3.49 82.55,4.13 | 95.89,18.73 R47.2 95.89,19.05 98.42,19.05 99.43,18.05 X7.1 99.67,16.81 99.69,16.83 | R43.1 81.92,9.21 80.64,7.94 5VOUT2.1 79.38,6.67 78.74,6.03 74.93,6.03 74.3,5.4 74.3,3.49 74.93,2.86 76.2,2.86 79.38,2.86 80.22,3.71 R42.2 80.33,4.13 82.55,4.13 | C67.+ 96.52,3.17 | 82.55,4.13 R41.2
A0  (via drill 0.7)
  Top 0.406: RTL.5 27.05,66.73 v26.25,67.74 | IC2.35 38.52,56.06 v38.44,56.06
  Bottom 0.406: v38.44,56.06 36.92,54.53 32.6,54.53 28.03,59.11 28.03,60.38 27.27,61.14 27.27,66.73 v26.25,67.74
A1  (via drill 0.7)
  Top 0.406: RTL.7 28.35,61.9 v28.28,61.65 | IC2.36 37.73,56.86 v36.41,55.55
  Bottom 0.406: v36.41,55.55 32.6,55.55 28.79,59.36 28.79,60.88 28.28,61.39 v28.28,61.65
A2  (via drill 0.7)
  Top 0.406: RTL.8 29,67.44 v29.3,67.74 | IC2.37 36.92,57.59 v36.66,57.33
  Bottom 0.406: v36.66,57.33 35.65,56.31 32.85,56.31 29.55,59.61 29.55,61.14 29.3,61.39 v29.3,67.74
A3  (via drill 0.7)
  Top 0.406: 36.12,58.31 IC2.38 | v33.87,57.33 35.14,57.33 36.12,58.31 | 36.12,58.31 36.16,58.34 | RTL.9 29.65,61.9 v30.32,61.9
  Bottom 0.406: v33.87,57.33 32.85,57.33 30.32,59.87 v30.32,61.9
A4
  Top 0.406: IC2.39 35.33,62.92 30.32,62.92 30.32,64.44 30.3,64.44 RTL.10
A5  (via drill 0.7)
  Top 0.406: IC2.40 34.52,58.6 v34.63,58.6 | RTL.29 42.65,63.05 42.25,62.66 v37.68,62.66
  Bottom 0.406: v34.63,58.6 37.68,58.6 v37.68,62.66
A6  (via drill 0.7)
  Top 0.406: IC2.41 33.73,61.65 v34.12,61.65 | RTL.30 43.3,62.63 42.31,61.65 41.24,61.65 36.44,61.62 v36.41,61.65
  Bottom 0.406: v36.41,61.65 v34.12,61.65
A7  (via drill 0.7)
  Top 0.406: IC2.42 32.92,58.6 v33.11,58.6 | RTL.33 39.76,68.71 v39.71,69.01
  Bottom 0.406: v39.71,69.01 39.71,63.93 33.11,63.93 v33.11,58.6
A8  (via drill 0.7)
  Top 0.406: IC1.42 127.09,66.81 v126.91,66.81 | RTL1.33 120.26,56.7 v120.31,56.4
  Bottom 0.406: v120.31,56.4 120.31,61.48 126.91,61.48 v126.91,66.81
A9  (via drill 0.7)
  Top 0.406: IC1.41 126.3,63.77 v125.89,63.77 | RTL1.30 116.72,62.78 117.71,63.77 118.78,63.77 123.58,63.79 v123.61,63.77
  Bottom 0.406: v123.61,63.77 v125.89,63.77
A10  (via drill 0.7)
  Top 0.406: IC2.9 34.52,48.44 36.81,50.72 v39.97,50.72 | RTL.4 26.4,62.81 v26.25,62.66
  Bottom 0.406: v26.25,62.66 26.5,62.66 26.5,60.88 27.27,60.12 27.27,56.82 29.05,55.04 29.05,54.03 29.55,53.52 29.55,52.5 30.06,51.99 31.08,51.99 31.59,51.49 39.2,51.49 v39.97,50.72
A11  (via drill 0.7)
  Top 0.406: IC1.40 125.5,66.81 v125.39,66.81 | RTL1.29 117.37,62.36 117.77,62.75 v122.34,62.75
  Bottom 0.406: v125.39,66.81 122.34,66.81 v122.34,62.75
A12
  Top 0.406: IC1.39 124.69,62.5 129.71,62.5 129.71,60.97 129.72,60.97 RTL1.10
A13  (via drill 0.7)
  Top 0.406: 123.89,67.1 IC1.38 | v126.15,68.08 124.88,68.08 123.89,67.1 | 123.89,67.1 123.86,67.07 | RTL1.9 130.37,63.51 v129.71,63.51
  Bottom 0.406: v126.15,68.08 127.17,68.08 129.71,65.55 v129.71,63.51
A14  (via drill 0.7)
  Top 0.406: RTL1.8 131.02,57.97 v130.72,57.67 | IC1.37 123.09,67.83 v123.36,68.08
  Bottom 0.406: v123.36,68.08 124.37,69.1 127.17,69.1 130.47,65.8 130.47,64.28 130.72,64.02 v130.72,57.67
A15  (via drill 0.7)
  Top 0.406: RTL1.7 131.67,63.51 v131.74,63.77 | IC1.36 122.3,68.55 v123.61,69.86
  Bottom 0.406: v123.61,69.86 127.42,69.86 131.23,66.05 131.23,64.53 131.74,64.02 v131.74,63.77
A16  (via drill 0.7)
  Top 0.406: RTL1.5 132.97,58.69 v133.77,57.67 | IC1.35 121.5,69.36 v121.58,69.36
  Bottom 0.406: v121.58,69.36 123.1,70.88 127.42,70.88 131.99,66.31 131.99,65.04 132.75,64.28 132.75,58.69 v133.77,57.67
A17  (via drill 0.7)
  Top 0.406: IC1.9 125.5,76.97 123.21,74.69 v120.05,74.69 | RTL1.4 133.62,62.61 v133.77,62.75
  Bottom 0.406: v133.77,62.75 133.51,62.75 133.51,64.53 132.75,65.29 132.75,68.59 130.97,70.37 130.97,71.39 130.47,71.89 130.47,72.91 129.96,73.42 128.94,73.42 128.44,73.93 120.81,73.93 v120.05,74.69
CAN_INT  (via drill 0.7)
  Top 0.406: IC4.12 40.32,40.23 v40.32,37.97 | IC2.8 33.72,44.32 | IC2.8 | v33.08,47.37 33.72,46.74 IC2.8
  Bottom 0.406: v40.32,37.97 40.32,45.85 37.91,48.26 33.97,48.26 v33.08,47.37
CAN_INT1  (via drill 0.7)
  Top 0.406: IC7.12 119.7,85.18 v119.7,87.44 | 126.3,80.97 126.3,81.09 | 126.3,80.97 IC1.8 | v126.94,78.04 126.3,78.68 126.3,80.97
  Bottom 0.406: v119.7,87.44 119.7,79.57 122.11,77.15 126.05,77.15 v126.94,78.04
CS
  Top 0.406: 35.33,44.53 35.37,44.58 | 35.33,44.53 IC2.10 | IC4.16 35.27,44.48 35.33,44.53
CS1
  Top 0.406: 124.69,80.88 124.65,80.83 | 124.69,80.88 IC1.10 | IC7.16 124.75,80.94 124.69,80.88
D0  (via drill 0.7)
  Top 0.406: IC2.51 26.25,56.65 26.25,56.57 25.49,56.57 23.71,58.34 23.71,59.11 v23.2,59.61 | RTL.36 43.02,70.66 v43.02,69.77
  Bottom 0.406: v23.2,59.61 22.95,59.87 22.95,76.38 28.03,76.38 28.03,74.6 43.02,74.6 v43.02,69.77
D1  (via drill 0.7)
  Top 0.406: IC2.50 25.62,57.45 24.98,58.09 v24.98,58.85 | RTL.37 42,71.31 v42,70.79
  Bottom 0.406: v24.98,58.85 24.98,59.36 23.71,60.63 23.71,69.77 26,72.31 29.05,72.31 29.05,73.84 42,73.84 v42,70.79
D2  (via drill 0.7)
  Top 0.406: IC2.49 26.32,59.29 v26.25,59.36 | RTL.38 40.73,71.96 40.73,70.79 v40.48,70.54
  Bottom 0.406: v26.25,59.36 26,59.36 24.47,60.88 24.47,69.27 26.76,71.55 29.81,71.55 29.81,73.08 40.73,73.08 40.73,70.79 v40.48,70.54
D3  (via drill 0.7)
  Top 0.406: IC2.48 28.1,60.05 26.76,61.39 v25.49,61.39 | RTL.39 39.71,72.61 v39.71,71.81
  Bottom 0.406: v25.49,61.39 25.23,61.65 25.23,68.76 27.27,70.79 30.57,70.79 30.57,72.31 39.2,72.31 v39.71,71.81
D4  (via drill 0.7)
  Top 0.406: IC2.47 28.93,56.7 v29.3,56.31 | RTL.40 47.15,73.26 v47.84,72.57
  Bottom 0.406: v29.3,56.31 29.81,56.31 32.35,53.77 37.94,53.77 39.46,55.3 39.46,58.6 45.05,64.19 45.05,72.57 v47.84,72.57
D5  (via drill 0.7)
  Top 0.406: v48.86,71.3 48.86,73.08 48.02,73.91 RTL.41 | IC2.46 29.73,58.68 30.32,58.09 30.32,54.79 v30.06,54.53
  Bottom 0.406: v30.06,54.53 30.57,54.53 32.09,53.01 38.19,53.01 40.22,55.04 40.22,58.34 46.06,64.19 46.06,71.3 v48.86,71.3
D6  (via drill 0.7)
  Top 0.406: v49.87,72.31 49.87,73.08 48.39,74.56 RTL.42 | IC2.45 30.52,58.9 31.08,58.34 31.08,53.52 v30.57,53.01
  Bottom 0.406: v49.87,72.31 49.87,70.28 47.08,70.28 47.08,64.19 40.98,58.09 40.98,54.79 38.44,52.25 31.84,52.25 31.08,53.01 v30.57,53.01
D7  (via drill 0.7)
  Top 0.406: IC2.44 31.32,61.14 v31.84,61.65 | RTL.43 43.88,75.21 43.02,74.35 33.62,74.35 v33.62,70.03
  Bottom 0.406: v31.84,61.65 32.35,62.15 32.35,67.74 33.62,67.74 v33.62,70.03
D8  (via drill 0.7)
  Top 0.406: IC1.51 133.77,68.77 133.77,68.85 134.53,68.85 136.31,67.07 136.31,66.31 v136.82,65.8 | RTL1.36 117,54.75 v117,55.64
  Bottom 0.406: v136.82,65.8 137.07,65.55 137.07,49.03 131.99,49.03 131.99,50.81 117,50.81 v117,55.64
D9  (via drill 0.7)
  Top 0.406: IC1.50 134.4,67.97 135.04,67.32 v135.04,66.56 | RTL1.37 118.02,54.1 v118.02,54.62
  Bottom 0.406: v135.04,66.56 135.04,66.05 136.31,64.78 136.31,55.64 134.02,53.1 130.97,53.1 130.97,51.58 118.02,51.58 v118.02,54.62
D10  (via drill 0.7)
  Top 0.406: IC1.49 133.69,66.13 v133.77,66.05 | RTL1.38 119.29,53.45 119.29,54.62 v119.55,54.88
  Bottom 0.406: v133.77,66.05 134.02,66.05 135.55,64.53 135.55,56.15 133.26,53.86 130.21,53.86 130.21,52.34 119.29,52.34 119.29,54.62 v119.55,54.88
D11  (via drill 0.7)
  Top 0.406: IC1.48 131.92,65.36 133.26,64.02 v134.53,64.02 | RTL1.39 120.31,52.8 v120.31,53.61
  Bottom 0.406: v134.53,64.02 134.78,63.77 134.78,56.66 132.75,54.62 129.45,54.62 129.45,53.1 120.81,53.1 v120.31,53.61
D12  (via drill 0.7)
  Top 0.406: IC1.47 131.09,68.71 v130.72,69.1 | RTL1.40 112.87,52.15 v112.18,52.84
  Bottom 0.406: v130.72,69.1 130.21,69.1 127.67,71.64 122.08,71.64 120.56,70.12 120.56,66.81 114.97,61.23 114.97,52.84 v112.18,52.84
D13  (via drill 0.7)
  Top 0.406: v111.16,54.12 111.16,52.34 112,51.5 RTL1.41 | IC1.46 130.29,66.73 129.71,67.32 129.71,70.62 v129.96,70.88
  Bottom 0.406: v129.96,70.88 129.45,70.88 127.93,72.4 121.83,72.4 119.8,70.37 119.8,67.07 113.96,61.23 113.96,54.12 v111.16,54.12
D14  (via drill 0.7)
  Top 0.406: v110.15,53.1 110.15,52.34 111.63,50.85 RTL1.42 | IC1.45 129.5,66.52 128.94,67.07 128.94,71.89 v129.45,72.4
  Bottom 0.406: v110.15,53.1 110.15,55.13 112.94,55.13 112.94,61.23 119.04,67.32 119.04,70.62 121.58,73.17 128.18,73.17 128.94,72.4 v129.45,72.4
D15  (via drill 0.7)
  Top 0.406: 128.69,65.37 IC1.44 128.69,64.28 v128.18,63.77 | RTL1.43 116.14,50.2 117,51.07 126.4,51.07 v126.4,55.38
  Bottom 0.406: v128.18,63.77 127.67,63.26 127.67,57.67 126.4,57.67 v126.4,55.38
GND  (via drill 0.7)
  Top 0.254: 21.93,71.3 21.93,70.79 RTL.95 | RTL.90 21.93,73.84 21.93,73.33 RTL.91 20.92,73.2 19.65,73.2 | 22.95,73.26 22.95,72.57 RTL.92 21.93,72.57 21.93,72.06 RTL.93 21.93,71.81 21.93,71.3 | 21.93,71.3 RTL.94 | RTL.28 42,64.69 41.49,64.69 RTL.27 41.24,64.69 | 39.97,64.69 RTL.25 | 40.73,64.69 RTL.26 | 21.93,75.87 21.93,75.36 RTL.88 | 21.93,75.87 21.93,76.38 RTL.86 20.92,76.5 19.65,76.5 | 21.93,75.87 RTL.87 | 42,82.47 42.51,82.47 RTL.52 | 38.19,64.69 RTL.22 37.94,64.69 | IC2.59 26.25,50.22 26.25,49.71 IC2.60 26.25,49.2 26.25,48.69 IC2.61 | 19.65,70.54 19.65,70.79 | RTL.56 39.97,81.46 40.48,80.95 v40.98,80.7 41.24,81.2 41.24,81.46 RTL.54 41.49,82.47 42,82.47 | RTL.18 35.65,64.69 36.16,64.69 RTL.19 | 37.43,64.69 RTL.21 | 42,82.47 RTL.53 | 39.46,64.69 RTL.24 | 38.7,64.69 RTL.23
  Top 0.406: IC2.53 24.23,55.05 23.71,54.53 23.46,54.53 23.2,54.28 | 23.2,54.28 C5.1 23.2,50.25 23.49,50.25 | C7.1 23.29,50.05 23.49,50.25 | IC2.59 23.49,50.25 | RTL.91 22.95,73.26 24.54,73.26 v24.73,73.08 | v30.82,67.74 arc-90 30.95,67.62 RTL.11 31.51,64.62 31.59,64.69 31.6,64.68 RTL.12 | v36.92,67.49 36.8,67.36 | v43.02,76.12 43.02,75.86 RTL.44 45.82,75.86 45.81,75.87 48.09,75.87 51.14,72.82 54.53,72.82 | RTL.55 40.7,80.7 v40.98,80.7 | RTL.64 34.85,79.68 v33.87,79.68 | 32.02,64.62 32.09,64.69 32.17,64.62 RTL.13 32.78,64.62 32.85,64.69 32.9,64.65 RTL.14 | 59.27,84.25 56.73,84.25 C4.2 58.51,84.16 v58.51,82.22 | 59.27,84.25 C3.1 | 59.27,84.25 61.81,84.25 | C14.2 64.35,84.25 61.81,84.25 | 61.81,84.25 C2.1 | R13.1 54.53,72.82 | 54.53,72.82 54.53,74.43 v55.46,75.36 | RTL.83 19.65,78.46 v19.65,78.41 | IC2.61 26.32,48.69 27.52,48.69 27.52,47.05 IC2.63 | 41.92,50.22 IC2.22 43.74,50.25 45.3,48.69 45.3,47.17 46.06,46.41 v47.33,46.41 | C6.1 51.14,46.41 v50.89,46.66 | IC5.8 63.34,50.47 76.03,50.47 | IC6.15 13.27,39.88 12.51,40.64 | 12.51,40.64 5.78,40.64 5.78,38.73 5.8,38.76 C23.2 5.82,37.12 5.78,37.08 5.87,36.99 C20.2 5.87,35.14 5.78,35.05 C19.2 | 23.2,54.28 22.54,54.28 22.36,54.28 | COM1.G2 12.71,71.04 12.97,70.79 | 12.51,40.64 8.95,40.64 7.68,41.91 7.68,55.24 9.84,57.53 13.78,57.53 | COM1.3 13.78,57.53 | 13.78,57.53 12.89,58.42 12.89,59.31 12.38,59.82 12.38,60.71 11.47,61.62 COM1.9 | 76.03,85.09 75.88,85.09 75.83,85.17
  Top 0.813: 36.8,67.36 36.8,64.69 | 36.8,64.69 RTL.20 | RTL.12 32.02,64.62 | CAN.1 76.03,41.66 76.03,41.58 | 76.06,33.43 76.03,41.58 | 76.03,41.58 76.03,50.47 76.03,63.93 | 76.03,63.93 76.03,80.7 | 76.03,80.7 76.03,85.09 76.09,92.84 | ETH.G1 71.46,63.93 76.03,63.93 | 76.03,80.7 ETH.G2 | ISP.4 ISP.6 ISP.8 ISP.10 | v40.98,80.7 40.98,79.43 37.68,79.43 35.65,77.39 33.87,77.39 33.87,77.65 | 33.87,77.65 v33.87,79.68 | v32.09,71.3 32.09,75.62 33.87,75.62 33.87,77.65 | 41.24,64.69 40.73,64.69 39.97,64.69 39.46,64.69 38.7,64.69 38.19,64.69 | 36.8,64.69 37.43,64.69 37.94,64.69 | 36.8,64.69 36.16,64.69 | 16.34,81.05 16.45,81.15 16.4,81.2 C11.- 16.34,80.19 18.12,78.41 v19.65,78.41 19.65,76.5 19.65,73.2 19.65,70.79 19.65,70.1 12.64,70.1 COM1.G2 | 19.65,70.54 19.65,62.76 18.48,61.59 18.48,57.51 | 18.48,57.51 COM1.3 | 18.48,57.51 18.63,57.51 21.91,54.23 22.54,54.23 22.54,54.28
  Bottom 0.406: 49.87,52.5 C8.1 | 49.87,52.5 C9.1 | C17.1 55.13,81.13 54.95,80.95 55.16,80.75 55.16,80.44 | 55.16,80.44 C18.1 | C24.2 26.5,73.08 v24.73,73.08 | C16.2 30.82,69.37 30.82,69.27 | 36.75,67.65 v36.92,67.49 | v40.98,80.7 40.82,80.7 C26.2 44.03,78.97 44.03,76.12 v43.02,76.12 C25.1 | v33.87,79.68 33.7,79.68 | 49.14,34.65 C29.2 C28.2 | 36.66,69.37 C15.1 | v55.46,75.36 56.48,76.38 56.48,80.44 | 56.48,80.44 55.16,80.44 | v58.51,82.22 56.73,80.44 56.48,80.44 | 50.89,49.45 v50.89,46.66 | 50.89,52.5 50.89,49.45 | 50.89,52.5 49.87,52.5 | v47.33,46.41 47.84,46.41 50.89,49.45 | IC5.8 60.8,53.01 50.89,53.01 50.89,52.5 | COM1.G1 15.43,47.78 15.43,56.13 14.16,57.4 14.01,57.4 COM1.3
  Bottom 0.813: v30.82,67.74 30.82,69.27 32.09,69.27 v32.09,71.3 36.66,71.3 36.66,69.37 | C15.1 36.75,67.65 | 33.7,79.68 C27.1 | IC3.GND 26.25,87.55 C13.2 C12.2 27.52,87.55 27.52,86.03 33.87,86.03 33.87,85.78 | ETH.G1 71.46,63.93 | v33.87,79.68 33.87,85.78 | 33.87,85.78 33.87,95.68 45.05,95.68 45.05,93.14 72.99,93.14 72.99,95.17 | v19.65,78.41 19.65,82.98 22.7,86.03 27.27,86.03 | IC5.2 53.96,48.18 52.39,46.61 50.94,46.61 v50.89,46.66 | X2.2 4.92,82.27 9.72,77.47 9.69,77.44 C10.- 9.69,73.18 12.64,70.23 COM1.G2
  other vias: 32.85,85.01 28.54,78.41 38.7,70.28 54.67,64.58 47.92,59.36 44.03,54.53 52.41,75.62 52.16,85.01 48.35,85.01 37.17,77.9 69.68,86.74 44.36,29.9 17.69,47.17 24.8,45.14 29.63,47.68
  pour Top (isolate 0.254): 0.39,99.42 0.32,25.68 77.2,25.78 77.1,99.52
  pour Bottom (isolate 0.254): 0.34,25.63 0.34,99.39 77.28,99.34 77.3,25.65
GND1  (via drill 0.7)
  Top 0.254: 138.09,54.12 138.09,54.62 RTL1.95 | RTL1.90 138.09,51.58 138.09,52.08 RTL1.91 139.1,52.21 140.37,52.21 | 137.07,52.15 137.07,52.84 RTL1.92 138.09,52.84 138.09,53.35 RTL1.93 138.09,53.61 138.09,54.12 | 138.09,54.12 RTL1.94 | RTL1.28 118.02,60.72 118.53,60.72 RTL1.27 118.78,60.72 | 120.05,60.72 RTL1.25 | 119.29,60.72 RTL1.26 | 138.09,49.54 138.09,50.05 RTL1.88 | 138.09,49.54 138.09,49.03 RTL1.86 139.1,48.91 140.37,48.91 | 138.09,49.54 RTL1.87 | 118.02,42.94 117.51,42.94 RTL1.52 | 121.83,60.72 RTL1.22 122.08,60.72 | IC1.59 133.77,75.2 133.77,75.7 IC1.60 133.77,76.21 133.77,76.72 IC1.61 | 140.37,54.88 140.37,54.62 | RTL1.56 120.05,43.95 119.55,44.46 v119.04,44.72 118.78,44.21 118.78,43.95 RTL1.54 118.53,42.94 118.02,42.94 | RTL1.18 124.37,60.72 123.86,60.72 RTL1.19 | 122.59,60.72 RTL1.21 | 118.02,42.94 RTL1.53 | 120.56,60.72 RTL1.24 | 121.32,60.72 RTL1.23
  Top 0.406: IC1.53 135.79,70.36 136.31,70.88 136.56,70.88 136.82,71.13 | 136.82,71.13 C30.1 136.82,75.17 136.53,75.17 | C32.1 136.73,75.36 136.53,75.17 | IC1.59 136.53,75.17 | RTL1.91 137.07,52.15 135.48,52.15 v135.29,52.34 | v129.2,57.67 arc-90 129.07,57.79 RTL1.11 128.51,60.79 128.44,60.72 128.42,60.73 RTL1.12 | v123.1,57.92 123.22,58.05 | v117,49.29 117,49.55 RTL1.44 114.2,49.55 114.21,49.54 111.92,49.54 108.88,52.59 105.49,52.59 | RTL1.55 119.32,44.72 v119.04,44.72 | RTL1.64 125.17,45.73 v126.15,45.73 | 128,60.79 127.93,60.72 127.85,60.79 RTL1.13 127.24,60.79 127.17,60.72 127.12,60.76 RTL1.14 | 100.75,41.16 103.29,41.16 C48.2 101.51,41.25 v101.51,43.19 | 100.75,41.16 C47.1 | 100.75,41.16 98.21,41.16 | C49.2 95.67,41.16 98.21,41.16 | 98.21,41.16 C46.1 | R23.1 105.49,52.59 | 105.49,52.59 105.49,50.98 v104.56,50.05 | RTL1.83 140.37,46.95 v140.37,47 | IC1.61 133.69,76.72 132.5,76.72 132.5,78.36 IC1.63 | 118.09,75.2 IC1.22 116.28,75.17 114.72,76.72 114.72,78.25 113.96,79.01 v112.69,79.01 | C31.1 108.88,79.01 v109.13,78.75 | IC8.8 96.69,74.94 83.98,74.94 | IC10.15 146.75,85.53 147.51,84.77 | 147.51,84.77 154.24,84.77 154.24,86.68 154.22,86.65 C58.2 154.2,88.29 154.24,88.33 154.15,88.42 C55.2 154.15,90.27 154.24,90.36 C54.2 | 136.82,71.13 137.48,71.13 137.66,71.13 | COM2.G2 147.31,54.37 147.05,54.62 | 147.51,84.77 151.07,84.77 152.34,83.5 152.34,70.17 150.18,67.88 146.24,67.88 | COM2.3 146.24,67.88 | 146.24,67.88 147.13,66.99 147.13,66.1 147.64,65.6 147.64,64.71 148.55,63.79 COM2.9 | 83.98,40.32 84.14,40.32 84.19,40.25
  Top 0.813: 123.22,58.05 123.22,60.72 | 123.22,60.72 RTL1.20 | RTL1.12 128,60.79 | CAN3.1 83.98,83.75 83.98,83.83 | 83.96,91.99 83.98,83.83 | 83.98,83.83 83.98,74.94 83.98,61.48 | 83.98,61.48 83.98,44.72 | 83.98,44.72 83.98,40.32 83.93,32.58 | ETH1.G1 88.56,61.48 83.98,61.48 | 83.98,44.72 ETH1.G2 | ISP1.4 ISP1.6 ISP1.8 ISP1.10 | v119.04,44.72 119.04,45.99 122.34,45.99 124.37,48.02 126.15,48.02 126.15,47.77 | 126.15,47.77 v126.15,45.73 | v127.93,54.12 127.93,49.8 126.15,49.8 126.15,47.77 | 118.78,60.72 119.29,60.72 120.05,60.72 120.56,60.72 121.32,60.72 121.83,60.72 | 123.22,60.72 122.59,60.72 122.08,60.72 | 123.22,60.72 123.86,60.72 | 143.68,44.36 143.57,44.26 143.62,44.21 C36.- 143.68,45.23 141.9,47 v140.37,47 140.37,48.91 140.37,52.21 140.37,54.62 140.37,55.31 147.38,55.31 COM2.G2 | 140.37,54.88 140.37,62.65 141.54,63.82 141.54,67.91 | 141.54,67.91 COM2.3 | 141.54,67.91 141.39,67.91 138.11,71.18 137.48,71.18 137.48,71.13
  Bottom 0.406: 110.15,72.91 C33.1 | 110.15,72.91 C34.1 | C43.1 104.89,44.28 105.07,44.46 104.86,44.67 104.86,44.97 | 104.86,44.97 C44.1 | C50.2 133.51,52.34 v135.29,52.34 | C42.2 129.2,56.05 129.2,56.15 | 123.27,57.76 v123.1,57.92 | v119.04,44.72 119.2,44.72 C52.2 115.99,46.44 115.99,49.29 v117,49.29 C51.1 | v126.15,45.73 126.31,45.73 | 110.88,90.77 C40.2 C39.2 | 123.36,56.05 C41.1 | v104.56,50.05 103.54,49.03 103.54,44.97 | 103.54,44.97 104.86,44.97 | v101.51,43.19 103.29,44.97 103.54,44.97 | 109.13,75.96 v109.13,78.75 | 109.13,72.91 109.13,75.96 | 109.13,72.91 110.15,72.91 | v112.69,79.01 112.18,79.01 109.13,75.96 | IC8.8 99.22,72.4 109.13,72.4 109.13,72.91 | COM2.G1 144.59,77.64 144.59,69.28 145.86,68.01 146.01,68.01 COM2.3
  Bottom 0.813: v129.2,57.67 129.2,56.15 127.93,56.15 v127.93,54.12 123.36,54.12 123.36,56.05 | C41.1 123.27,57.76 | 126.31,45.73 C53.1 | IC9.GND 133.77,37.86 C38.2 C37.2 132.5,37.86 132.5,39.38 126.15,39.38 126.15,39.64 | ETH1.G1 88.56,61.48 | v126.15,45.73 126.15,39.64 | 126.15,39.64 126.15,29.73 114.97,29.73 114.97,32.27 87.03,32.27 87.03,30.24 | v140.37,47 140.37,42.43 137.32,39.38 132.75,39.38 | IC8.2 106.06,77.23 107.63,78.8 109.08,78.8 v109.13,78.75 | X1.2 155.1,43.14 150.3,47.94 150.33,47.97 C35.- 150.33,52.23 147.38,55.18 COM2.G2
  other vias: 127.17,40.4 131.48,47 121.32,55.13 105.35,60.84 112.1,66.05 115.99,70.88 107.61,49.8 107.86,40.4 111.67,40.4 122.85,47.51 90.34,38.67 115.66,95.52 142.33,78.24 135.22,80.28 130.39,77.74
  pour Top (isolate 0.254): 159.63,26 159.7,99.73 82.82,99.63 82.92,25.9
  pour Bottom (isolate 0.254): 159.68,99.78 159.68,26.02 82.74,26.07 82.72,99.76
GND2  (via drill 0.7)
  Top 0.406: C59.- 24.77,11.11 v21.27,11.11 | JP3.2 5.08,18.1 X4.10
  Bottom 0.406: 21.19,11.11 21.19,9.21 IC11.21 21.19,5.8 21.59,5.4 22.23,5.4 C60.2 | 21.19,11.11 21.19,12.15 20.95,12.38 20.39,12.95 IC11.3 20.39,16.76 19.05,18.1 17.78,19.37 17.78,20 | 34.92,16.83 34.91,16.81 X3.4 34.76,17.29 35.56,18.1 39.37,18.1 | 42.55,16.83 41.27,18.1 39.37,18.1 | D3.1 39.2,17.93 39.37,18.1 | D4.1 40.32,14.6 42.55,16.83 | C61.1 21.59,21.27 C61.1 | 22.23,21.27 C62.2 | 22.23,21.27 C61.1 | X4.10 X4.8 | JP3.2 10.16,17.46 10.16,18.73 11.43,20 17.78,20 | 41.59,2.22 41.39,2.22 S1.4 | S1.4 41.31,2.22 | 41.31,2.22 41.27,2.22 | 41.27,2.22 34.92,2.22 34.89,2.22 S1.3 31,6.03 C59.- | v21.27,11.11 21.19,11.11 | 17.78,20 17.78,21.27 18.41,21.91 18.73,22.23 21.27,22.23 22.23,21.27 | 22.23,21.27 C61.1 | 42.55,16.83 43.5,15.88 43.5,3.81 41.91,2.22 41.27,2.22 | 41.31,2.22 41.27,2.22 | S1.4 41.31,2.22
  pour Bottom: 0.32,0.32 44.77,0.32 44.77,23.5 0.32,23.5
  pour Top: 0,0.32 44.77,0.32 44.77,23.5 0,23.5
GND3  (via drill 0.7)
  Top 0.406: C63.- 135.25,12.7 v138.75,12.7 | JP5.2 154.94,5.71 X6.10
  Bottom 0.406: 138.83,12.7 138.83,14.61 IC12.21 138.83,18.02 138.43,18.41 137.79,18.41 C64.2 | 138.83,12.7 138.83,11.66 139.06,11.43 139.63,10.87 IC12.3 139.63,7.05 140.97,5.71 142.24,4.45 142.24,3.81 | 125.09,6.99 125.11,7 X5.4 125.27,6.52 124.46,5.71 120.65,5.71 | 117.47,6.99 118.75,5.71 120.65,5.71 | D5.1 120.82,5.88 120.65,5.71 | D6.1 119.7,9.21 117.47,6.99 | C65.1 138.43,2.54 C65.1 | 137.79,2.54 C66.2 | 137.79,2.54 C65.1 | X6.10 X6.8 | JP5.2 149.86,6.35 149.86,5.08 148.59,3.81 142.24,3.81 | 118.43,21.59 118.63,21.59 S2.4 | S2.4 118.71,21.59 | 118.71,21.59 118.75,21.59 | 118.75,21.59 125.09,21.59 125.13,21.59 S2.3 129.02,17.78 C63.- | v138.75,12.7 138.83,12.7 | 142.24,3.81 142.24,2.54 141.6,1.91 141.29,1.59 138.75,1.59 137.79,2.54 | 137.79,2.54 C65.1 | 117.47,6.99 116.52,7.94 116.52,20 118.11,21.59 118.75,21.59 | 118.71,21.59 118.75,21.59 | S2.4 118.71,21.59
  pour Bottom: 159.7,23.5 115.25,23.5 115.25,0.32 159.7,0.32
  pour Top: 160.02,23.5 115.25,23.5 115.25,0.32 160.02,0.32
GND4  (via drill 0.7)
  Top 0.406: C67.- 91.44,11.11 v87.95,11.11 | JP7.2 71.75,18.1 X8.10
  Bottom 0.406: 87.86,11.11 87.86,9.21 IC13.21 87.86,5.8 88.27,5.4 88.9,5.4 C68.2 | 87.86,11.11 87.86,12.15 87.63,12.38 87.06,12.95 IC13.3 87.06,16.76 85.72,18.1 84.45,19.37 84.45,20 | 101.6,16.83 101.58,16.81 X7.4 101.43,17.29 102.23,18.1 106.05,18.1 | 109.22,16.83 107.95,18.1 106.05,18.1 | D7.1 105.88,17.93 106.05,18.1 | D8.1 107,14.6 109.22,16.83 | C69.1 88.27,21.27 C69.1 | 88.9,21.27 C70.2 | 88.9,21.27 C69.1 | X8.10 X8.8 | JP7.2 76.83,17.46 76.83,18.73 78.11,20 84.45,20 | 108.27,2.22 108.06,2.22 S3.4 | S3.4 107.99,2.22 | 107.99,2.22 107.95,2.22 | 107.95,2.22 101.6,2.22 101.56,2.22 S3.3 97.68,6.03 C67.- | v87.95,11.11 87.86,11.11 | 84.45,20 84.45,21.27 85.09,21.91 85.41,22.23 87.95,22.23 88.9,21.27 | 88.9,21.27 C69.1 | 109.22,16.83 110.17,15.88 110.17,3.81 108.58,2.22 107.95,2.22 | 107.99,2.22 107.95,2.22 | S3.4 107.99,2.22
  pour Bottom: 66.99,0.32 111.44,0.32 111.44,23.5 66.99,23.5
  pour Top: 66.67,0.32 111.44,0.32 111.44,23.5 66.67,23.5
MISO  (via drill 0.7)
  Top 0.406: IC2.13 37.73,45.92 v38.29,46.48 | IC4.15 36.54,38.63 v36.13,38.23
  Bottom 0.406: v38.29,46.48 37.27,47.5 35.37,47.5 35.12,47.24 35.12,39.24 v36.13,38.23
MISO1  (via drill 0.7)
  Top 0.406: IC1.13 122.3,79.5 v121.73,78.93 | IC7.15 123.48,86.78 v123.89,87.19
  Bottom 0.406: v121.73,78.93 122.75,77.92 124.65,77.92 124.9,78.17 124.9,86.17 v123.89,87.19
MOSI  (via drill 0.7)
  Top 0.406: IC2.12 36.92,45.82 v36.26,46.48 | IC4.14 37.81,38.33 v38.04,38.1
  Bottom 0.406: v38.04,38.1 36.26,39.88 v36.26,46.48
MOSI1  (via drill 0.7)
  Top 0.406: IC1.12 123.09,79.6 v123.76,78.93 | IC7.14 122.21,87.08 v121.98,87.31
  Bottom 0.406: v121.98,87.31 123.76,85.53 v123.76,78.93
N$1
  Top 0.305: RTL.58 38.75,83.79 39.2,84.25 44.28,84.25 45.05,85.01 45.05,95.17 46.32,96.44 U$2.6
  Bottom 0.406: R1.2 57.33,94.41 47.84,94.41 U$2.6 47.84,96.7
N$2
  Top 0.406: IC5.1 54.85,50.72 53.28,49.15 53.28,42.29 50.74,39.75 50.74,28.07 32.73,28.07 IC4.1
N$3
  Top 0.305: RTL.59 38.1,83.91 38.95,84.76 44.03,84.76 44.54,85.27 44.54,96.95 45.81,98.22 51.91,98.22 52.92,97.21 U$2.4
  Bottom 0.406: R1.1 U$2.4
N$4  (via drill 0.7)
  Top 0.406: U$2.3 62.32,98.22 66.38,98.22 67.65,96.95 67.65,88.57 68.16,88.06 68.16,85.01 67.31,84.16 C1.1 66.97,84.16 66.99,84.14 v68.26,82.87 | RTL.46 47.84,77.16 v47.84,78.41
  Bottom 0.406: v47.84,78.41 47.84,75.87 50.89,72.82 58.51,72.82 59.78,74.09 63.84,74.09 63.84,82.23 66.99,82.23 67.63,82.23 v68.26,82.87
N$5
  Top 0.406: C7.2 23.29,48.35 23.79,47.85 IC2.62
N$6
  Top 0.406: Q1.1 47.33,55.04 44.14,51.85 IC2.24
  Bottom 0.406: Q1.1 47.33,55.04 47.42,55.13 C9.2
N$7
  Top 0.406: Q1.2 47.33,50.22 46.5,51.05 IC2.23
  Bottom 0.406: Q1.2 47.46,50.09 47.59,50.22 47.67,50.13 C8.2
N$8
  Bottom 0.813: C12.1 29.13,87.64 29.3,87.81 28.79,88.32 IC3.IN 28.79,97.97 21.17,97.97 21.17,88.82 13.27,80.92 13.27,77.34 13.25,77.37 C10.+ 13.25,77.24 14.8,75.69 D1.C
N$9
  Top 0.406: R7.2 70.85,59.88 70.85,59.97 POWER.C
N$10
  Bottom 0.813: D1.A 16.6,66.55 9.46,66.55 1.84,74.17 1.84,88.14 1.97,88.27 4.89,88.27 X2.1
N$11  (via drill 0.7)
  Top 0.406: C1.2 v66.89,87.3 66.89,95.17 U$2.1 | RTL.45 48.86,76.51 v48.86,77.14
  Bottom 0.406: v48.86,77.14 48.86,75.87 51.14,73.58 55.46,73.58 57.24,75.36 58.51,75.36 60.03,76.89 63.08,76.89 63.08,83.05 66.89,83.05 v66.89,87.3
N$12
  Top 0.406: C3.2 59.27,92.38 58,93.65 51.91,93.65 50.63,94.92 50.63,96.19 U$2.5
N$13
  Top 0.406: C2.2 61.81,95.17 U$2.2
N$14
  Top 0.406: U$2.11 63.34,88.82 64.35,87.81 C14.1
N$15
  Top 0.406: C4.1 56.73,89.33 55.21,90.86 51.4,90.86 50.38,89.84 U$2.8
N$16
  Top 0.813: CAN.4 61.99,58.17 F2.P$1
N$17
  Top 0.406: IC6.1 12,29.59 C21.2
N$18
  Top 0.406: U$2.12 65.62,82.22 62.57,82.22 62.57,67.74 60.54,67.74 ETH.1-1
N$19  (via drill 0.7)
  Top 0.406: v60.54,82.22 61.81,82.22 61.81,69.27 58,69.27 ETH.1-2
  Bottom 0.406: v60.54,82.22 U$2.10
N$20
  Top 0.406: U$2.9 55.46,86.28 55.46,83.49 59.27,79.68 59.27,71.55 60.54,70.28 ETH.1-3
N$21
  Top 0.406: 36.13,26.92 49.8,26.95 51.7,26.95 51.7,39.32 55.44,43.05 | 36.13,26.92 36.01,26.92 | 55.44,43.05 55.46,43.05 IC5.4 55.46,43.08 55.44,43.05 | 55.44,43.05 55.31,43.05 | IC4.2 34,32.64 31.56,32.64 31.56,26.92 36.13,26.92
N$22